# EAGLE board MODULO2_def (EAGLE 7.1.0)
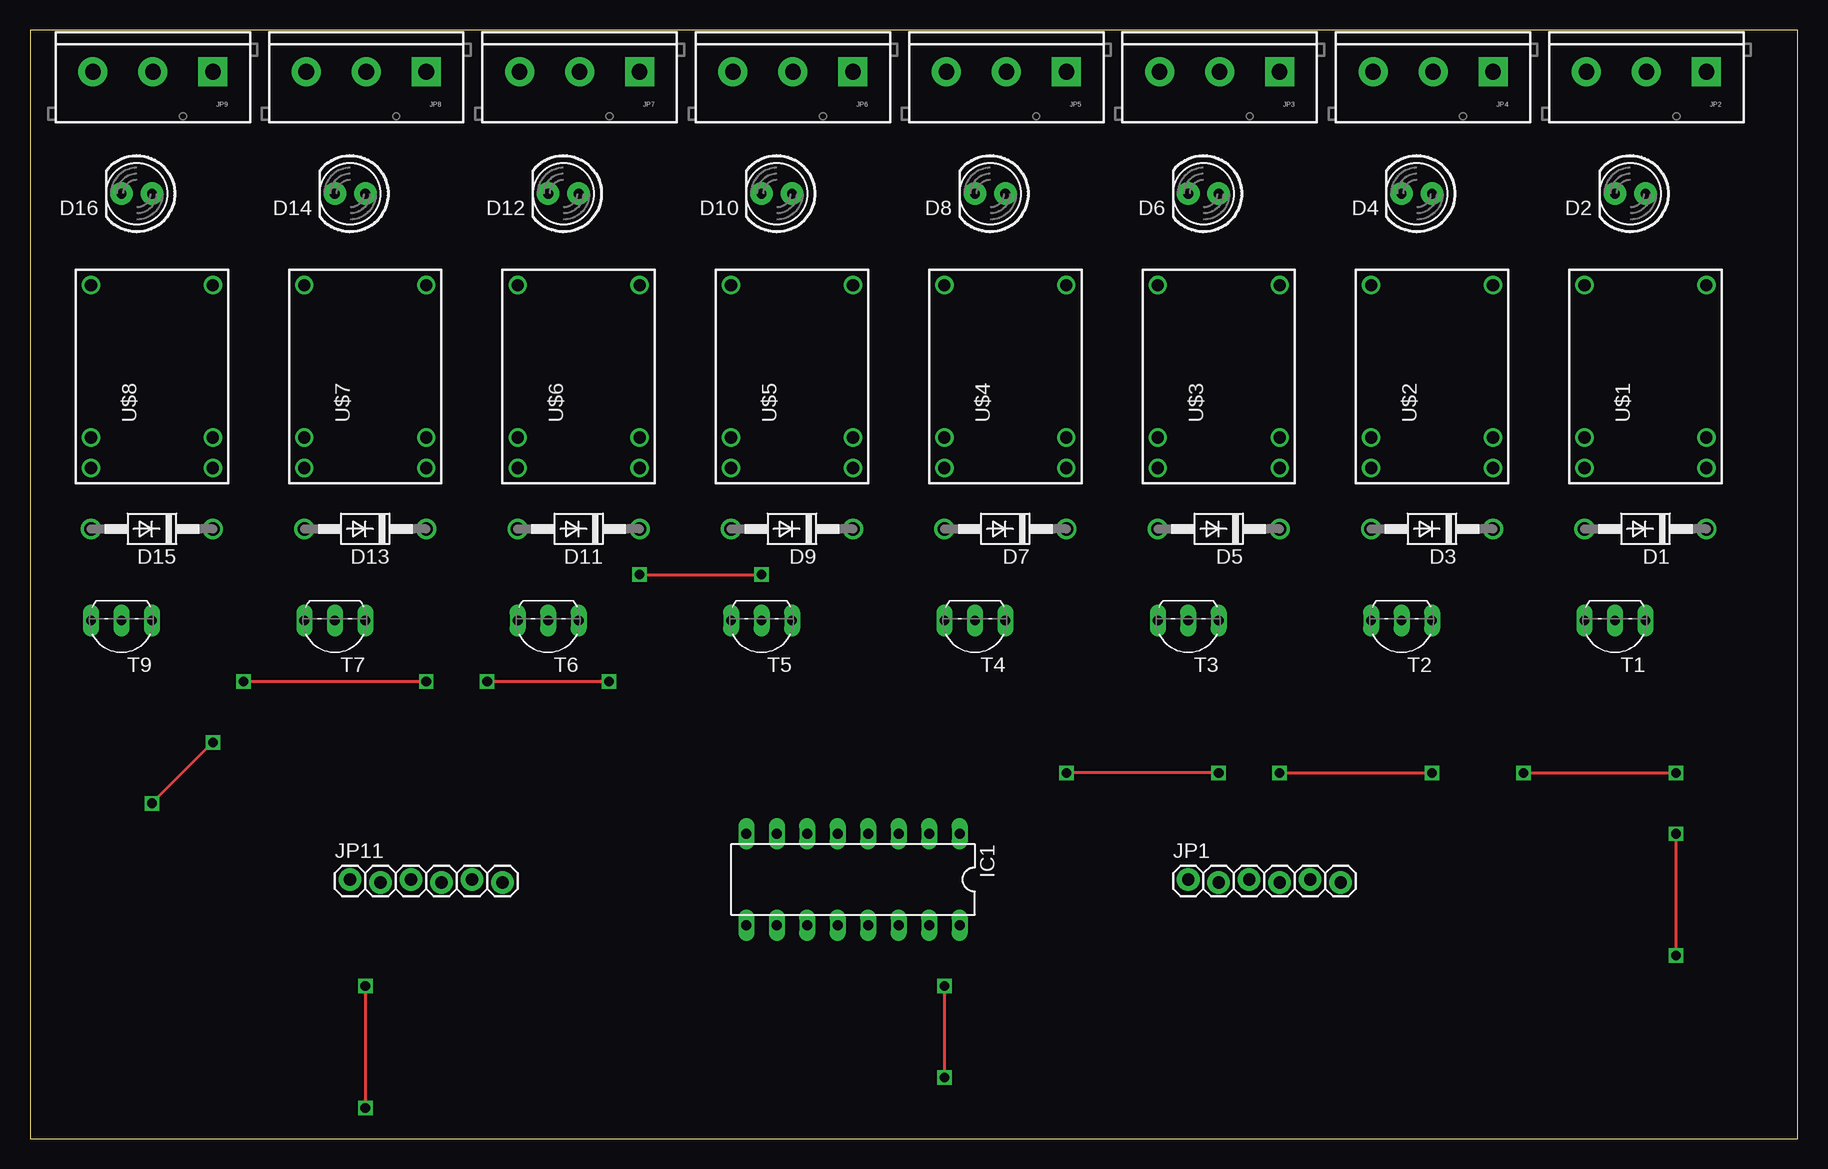
[diagram p0: board, top side]
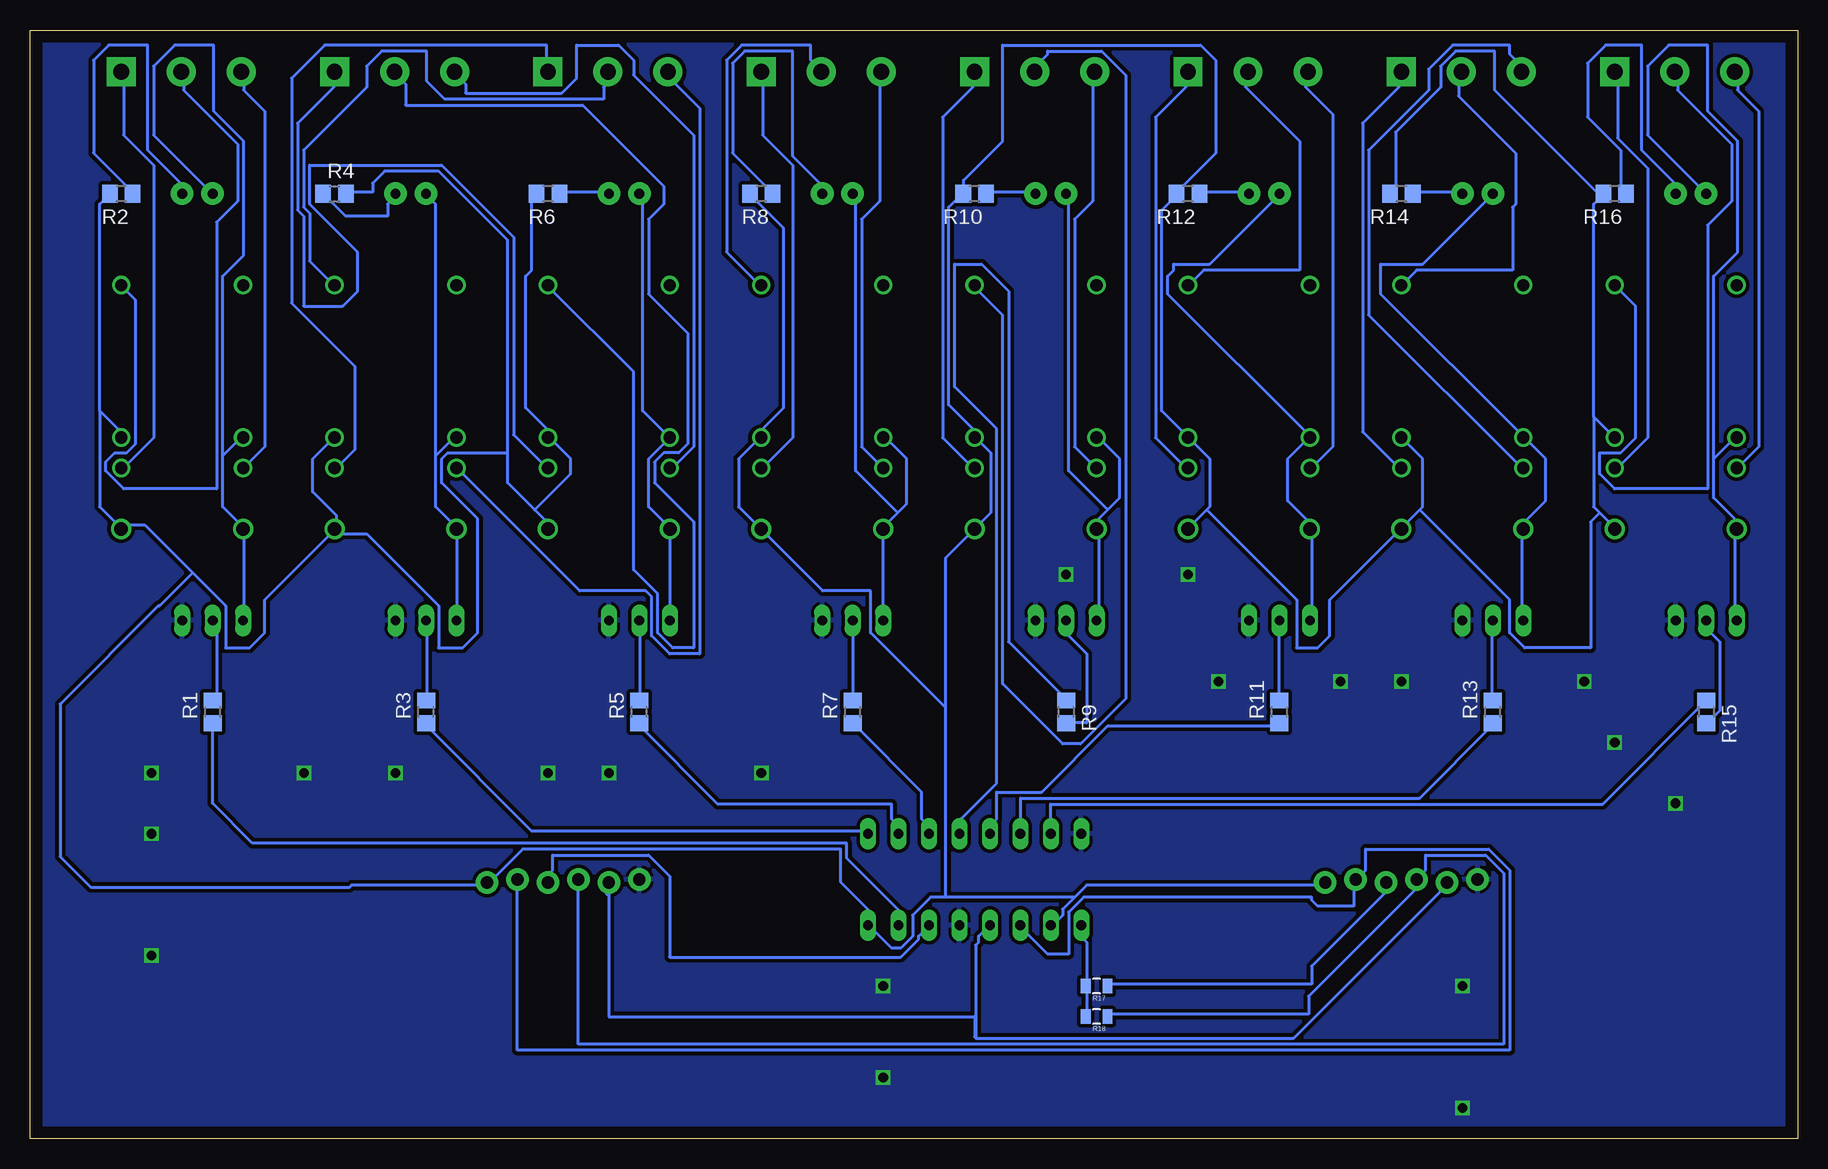
[diagram p1: board, bottom side, seen from below]

Size 147.3 x 92.38 mm. Coordinates in mm from the lower left corner, seen from the top.
Outline: 0,0 147.3,0 147.3,92.38 0,92.38 0,0
Copper layers (1*16): Top 0.035mm / dielectric 1.5mm / Bottom 0.035mm
Design rules "default": minimum track width 10mil, minimum drill 24mil, track to track 8mil, track to pad 8mil, pad to pad 8mil, via to via 8mil, smd to smd 8mil, copper to edge 40mil, drill to drill 8mil, minimum pad ring 10mil, minimum via ring 8mil, stop-mask expansion 4mil, vias tented up to drill 0mil, thermal gap 10mil

## Footprints (pad centres in the part's own frame; a part is rotated, then mirrored left to right if it is on the bottom)
DO41-10 = drill 1.118: A 5.08,0; C -5.08,0
LED5MM = drill 0.813 pad 1.88: A -1.27,0; K 1.27,0
DIL16 = drill 0.813 long: 1 -8.89,-3.81; 2 -6.35,-3.81; 3 -3.81,-3.81; 4 -1.27,-3.81; 5 1.27,-3.81; 6 3.81,-3.81; 7 6.35,-3.81; 8 8.89,-3.81; 9 8.89,3.81; 10 6.35,3.81; 11 3.81,3.81; 12 1.27,3.81; 13 -1.27,3.81; 14 -3.81,3.81; 15 -6.35,3.81; 16 -8.89,3.81
1X06_LOCK = drill 1.016 pad 1.88: 1 0,0; 2 2.54,-0.254; 3 5.08,0; 4 7.62,-0.254; 5 10.16,0; 6 12.7,-0.254
SCREWTERMINAL-5MM-3 = drill 1.3 pad 2.413 square: 1 0,0 | drill 1.3 pad 2.413: 2 5,0; 3 10,0
R0805 = smd 1.3 x 1.5: 1 -0.95,0; 2 0.95,0
0805 = smd 0.8 x 1.2: 1 -0.9,0; 2 0.9,0
TO92-EBC = drill 0.813 long: B 0,-1.27; C 2.54,-1.27; E -2.54,-1.27
HK4100 = drill 1.016: 1 7.62,5.08; 6 -5.08,5.08; 7 -7.62,5.08; 8 -7.62,-5.08; 9 -5.08,-5.08; 14 7.62,-5.08

## Placement (x,y rotation side)
D1  1N4933  [DO41-10]  134.62,50.8 180 top
D2  [LED5MM]  133.35,78.74 180 top
D3  1N4933  [DO41-10]  116.84,50.8 180 top
D4  [LED5MM]  115.57,78.74 180 top
D5  1N4933  [DO41-10]  99.06,50.8 180 top
D6  [LED5MM]  97.79,78.74 180 top
D7  1N4933  [DO41-10]  81.28,50.8 180 top
D8  [LED5MM]  80.01,78.74 180 top
D9  1N4933  [DO41-10]  63.5,50.8 180 top
D10  [LED5MM]  62.23,78.74 180 top
D11  1N4933  [DO41-10]  45.72,50.8 180 top
D12  [LED5MM]  44.45,78.74 180 top
D13  1N4933  [DO41-10]  27.94,50.8 180 top
D14  [LED5MM]  26.67,78.74 180 top
D15  1N4933  [DO41-10]  10.16,50.8 180 top
D16  [LED5MM]  8.89,78.74 180 top
IC1  74HC595N  [DIL16]  68.58,21.59 180 top
JP1  [1X06_LOCK]  96.52,21.59 0 top
JP2  [SCREWTERMINAL-5MM-3]  139.7,88.9 180 top
JP3  [SCREWTERMINAL-5MM-3]  104.14,88.9 180 top
JP4  [SCREWTERMINAL-5MM-3]  121.92,88.9 180 top
JP5  [SCREWTERMINAL-5MM-3]  86.36,88.9 180 top
JP6  [SCREWTERMINAL-5MM-3]  68.58,88.9 180 top
JP7  [SCREWTERMINAL-5MM-3]  50.8,88.9 180 top
JP8  [SCREWTERMINAL-5MM-3]  33.02,88.9 180 top
JP9  [SCREWTERMINAL-5MM-3]  15.24,88.9 180 top
JP11  [1X06_LOCK]  26.67,21.59 0 top
R1  [R0805]  132.08,35.56 90 bottom
R2  [R0805]  139.7,78.74 180 bottom
R3  [R0805]  114.3,35.56 90 bottom
R4  [R0805]  121.92,78.74 0 bottom
R5  [R0805]  96.52,35.56 90 bottom
R6  [R0805]  104.14,78.74 180 bottom
R7  [R0805]  78.74,35.56 90 bottom
R8  [R0805]  86.36,78.74 180 bottom
R9  [R0805]  60.96,35.56 270 bottom
R10  [R0805]  68.58,78.74 180 bottom
R11  [R0805]  43.18,35.56 90 bottom
R12  [R0805]  50.8,78.74 180 bottom
R13  [R0805]  25.4,35.56 90 bottom
R14  [R0805]  33.02,78.74 180 bottom
R15  [R0805]  7.62,35.56 270 bottom
R16  [R0805]  15.24,78.74 180 bottom
R17  [0805]  58.42,12.7 180 bottom
R18  [0805]  58.42,10.16 180 bottom
T1  [TO92-EBC]  132.08,41.91 180 top
T2  [TO92-EBC]  114.3,41.91 180 top
T3  [TO92-EBC]  96.52,41.91 180 top
T4  [TO92-EBC]  78.74,41.91 180 top
T5  [TO92-EBC]  60.96,41.91 180 top
T6  [TO92-EBC]  43.18,41.91 180 top
T7  [TO92-EBC]  25.4,41.91 180 top
T9  [TO92-EBC]  7.62,41.91 180 top
U$1  HK4100_DC5V_SHGHK  [HK4100]  134.62,63.5 90 top
U$2  HK4100_DC5V_SHGHK  [HK4100]  116.84,63.5 90 top
U$3  HK4100_DC5V_SHGHK  [HK4100]  99.06,63.5 90 top
U$4  HK4100_DC5V_SHGHK  [HK4100]  81.28,63.5 90 top
U$5  HK4100_DC5V_SHGHK  [HK4100]  63.5,63.5 90 top
U$6  HK4100_DC5V_SHGHK  [HK4100]  45.72,63.5 90 top
U$7  HK4100_DC5V_SHGHK  [HK4100]  27.94,63.5 90 top
U$8  HK4100_DC5V_SHGHK  [HK4100]  10.16,63.5 90 top

## Library data of the parts
D1 D3 D5 D7 D9 D11 D13 D15 = diode
D2 D4 D6 D8 D10 D12 D14 D16 = SparkFun-LED
IC1 = 74xx-eu
JP1 JP11 = SparkFun-Connectors
JP2-JP9 = SparkFun-Connectors; STOREFRONT_ID: PRT-08433
R1-R16 = resistor
R17 R18 = SparkFun-Resistors
T1-T7 T9 = transistor
U$1-U$8 = SparkFun-Electromechanical

## Nets
CS: IC1.12 JP1.2 JP11.2
GND: IC1.8 IC1.13 JP1.1 JP11.1 T1.E T2.E T3.E T4.E T5.E T6.E T7.E T9.E
N$1: IC1.15 R1.1
N$2: IC1.1 R3.1
N$3: D1.A D2.K T1.C U$1.6
N$4: D2.A R2.1
N$5: R1.2 T1.B
N$6: D3.A D4.K T2.C U$2.6
N$7: D5.A D6.K T3.C U$3.6
N$8: D6.A R6.1
N$9: R5.2 T3.B
N$10: D7.A D8.K T4.C U$4.6
N$11: D8.A R8.1
N$12: R7.2 T4.B
N$13: IC1.3 R7.1
N$14: D4.A R4.1
N$15: R3.2 T2.B
N$16: IC1.2 R5.1
N$17: D9.A D10.K T5.C U$5.6
N$18: D10.A R10.1
N$19: R9.2 T5.B
N$20: D11.A D12.K T6.C U$6.6
N$21: D12.A R12.1
N$22: R11.2 T6.B
N$23: D13.A D14.K T7.C U$7.6
N$24: D14.A R14.1
N$25: R13.2 T7.B
N$26: D15.A D16.K T9.C U$8.6
N$27: D16.A R16.1
N$28: R15.2 T9.B
N$29: IC1.5 R11.1
N$30: IC1.4 R9.1
N$31: IC1.6 R13.1
N$32: IC1.7 R15.1
N$33: JP2.1 U$1.8
N$34: JP2.2 U$1.14
N$35: JP2.3 U$1.7
N$36: JP3.1 U$2.8
N$37: JP3.2 U$2.14
N$38: JP3.3 U$2.7
N$39: JP4.1 U$3.8
N$40: JP4.2 U$3.14
N$41: JP4.3 U$3.7
N$42: JP5.1 U$4.8
N$43: JP5.2 U$4.14
N$44: JP5.3 U$4.7
N$45: JP6.1 U$5.8
N$46: JP6.2 U$5.14
N$47: JP6.3 U$5.7
N$48: JP7.1 U$6.8
N$49: JP7.2 U$6.14
N$50: JP7.3 U$6.7
N$51: JP8.1 U$7.8
N$52: JP8.2 U$7.14
N$53: JP8.3 U$7.7
N$54: JP9.1 U$8.8
N$55: JP9.2 U$8.14
N$56: JP9.3 U$8.7
OUTPUT: JP11.4 R17.1
QH: IC1.9 R17.2 R18.2
SCLK: IC1.11 JP1.5 JP11.5
SDI: JP1.3 JP11.3 R18.1
SDO: IC1.14 JP1.4
VCC: D1.C D3.C D5.C D7.C D9.C D11.C D13.C D15.C IC1.10 IC1.16 JP1.6 JP11.6 R2.2 R4.2 R6.2 R8.2 R10.2 R12.2 R14.2 R16.2 U$1.9 U$2.9 U$3.9 U$4.9 U$5.9 U$6.9 U$7.9 U$8.9

## Tracks (layer width: path | path; a pad name or v marks a point on that pad's centre or on a via)
CS
  Bottom 0.254: IC1.12 67.5,17.63 68.25,16.88 68.25,16.38 68.5,16.13 68.5,8.38 | JP1.2 99.25,21.13 99.25,20.38 99.06,20.38 99.06,10.16 68.58,10.16 68.58,8.46 68.5,8.38 | 68.5,8.38 42,8.38 29.25,21.13 JP11.2
GND  (via drill 0.8)
  Top 0.254: v17.78,38.1 v33.02,38.1 | v38.1,38.1 v48.26,38.1 | v15.24,33.02 v10.16,27.94 | v76.2,12.7 v76.2,5.08 | v27.94,12.7 v27.94,2.54 | v50.8,46.99 v60.96,46.99 | v99.06,30.48 v86.36,30.48 | v104.14,30.48 v116.84,30.48 | v124.46,30.48 v137.16,30.48 | v137.16,25.4 v137.16,15.24
  pour Bottom (isolate 0.305): 0,0 0,92.08 147.32,92.08 147.32,0
N$1
  Bottom 0.254: 132,34.38 R1.1 132.08,27.94 128.77,24.63 79.25,24.63 79.25,23.38 74.75,18.88 74.75,17.88 IC1.15
N$2
  Bottom 0.254: R3.1 114.25,34.38 105.5,25.63 77.5,25.63 IC1.1
N$3
  Bottom 0.254: T1.C 129.5,43.38 129.5,50.63 D1.A 129.75,50.88 129.75,51.13 131.25,52.63 131.25,56.88 | 131.25,56.88 129.75,58.38 U$1.6 | 131.25,56.88 131.25,71.88 129.5,73.63 129.5,83.13 132,85.63 132,91.13 135.25,91.13 137,89.38 137,83.63 132.25,78.88 D2.K
N$4
  Bottom 0.254: R2.1 138.75,78.88 142,82.13 142,89.88 140.75,91.13 137.5,91.13 137.5,82.38 134.75,79.63 134.75,78.88 D2.A
N$5
  Bottom 0.254: R1.2 132,36.63 131.75,36.88 131.75,42.88 132,43.13 T1.B
N$6
  Bottom 0.254: T2.C 111.75,43.38 111.75,50.63 D3.A 112,50.88 112,51.13 113.5,52.63 113.5,56.88 | 113.5,56.88 112,58.38 U$2.6 | 113.5,56.88 113.5,77.88 114.25,78.63 D4.K
N$7
  Bottom 0.254: T3.C 94,43.38 94,50.63 D5.A 94,50.88 95.75,52.63 95.75,56.63 94,58.38 | 94,58.38 96.25,60.63 96.25,78.38 96.5,78.63 D6.K | 94,58.38 U$3.6
N$8
  Bottom 0.254: R6.1 103,78.88 99.25,78.88 D6.A
N$9
  Bottom 0.254: R5.2 96.5,36.63 96.5,43.13 T3.B
N$10
  Bottom 0.254: T4.C 76.25,43.38 76.25,50.63 D7.A 76,50.88 76,51.13 75,52.13 | 75,52.13 74.25,52.88 74.25,56.63 76,58.38 U$4.6 | 75,52.13 78.5,55.63 78.5,78.63 D8.K
N$11
  Bottom 0.254: R8.1 85.5,78.88 88.75,82.13 88.75,89.63 87.75,90.63 83.75,90.63 83.75,81.88 81.5,79.63 81.5,78.88 D8.A
N$12
  Bottom 0.254: R7.2 78.75,36.63 78.75,43.13 T4.B
N$13
  Bottom 0.254: R7.1 78.5,34.38 73,28.88 73,26.63 72.5,26.13 72.5,25.63 IC1.3
N$14
  Bottom 0.254: R4.1 122.75,78.63 121,76.88 117.5,76.88 117.5,77.88 117,78.38 117,78.63 D4.A
N$15
  Bottom 0.254: R3.2 114.25,36.63 114.25,43.13 T2.B
N$16
  Bottom 0.254: R5.1 96.5,34.38 90,27.88 75.5,27.88 75.5,26.63 75,26.13 75,25.63 IC1.2
N$17
  Bottom 0.254: T5.C 58.25,43.38 58.25,50.63 D9.A 58.25,50.88 58.25,51.63 57.5,52.38 | 57.5,52.38 56.5,53.38 56.5,56.63 58.25,58.38 U$5.6 | 57.5,52.38 60.75,55.63 60.75,78.63 D10.K
N$18
  Bottom 0.254: R10.1 67.5,78.88 63.5,78.88 D10.A
N$19
  Bottom 0.254: R9.2 60.75,34.63 59.25,34.63 59.25,40.38 60.75,41.88 60.75,43.13 T5.B
N$20
  Bottom 0.254: T6.C 40.5,43.38 40.5,50.63 D11.A 40.75,50.88 40.75,51.38 42.5,53.13 42.5,56.63 40.75,58.38 U$6.6 40.75,58.63 52.5,70.38 52.5,71.88 52,72.38 52,72.88 49,72.88 43.25,78.63 D12.K
N$21
  Bottom 0.254: R12.1 49.75,78.88 45.75,78.88 D12.A
N$22
  Bottom 0.254: R11.2 43.25,36.63 43.25,43.13 T6.B
N$23
  Bottom 0.254: T7.C 23,43.38 23,50.63 D13.A 22.75,50.88 22.75,51.38 21,53.13 21,56.63 22.75,58.38 U$7.6 23,58.63 34.75,70.38 34.75,72.88 31.25,72.88 25.5,78.63 D14.K
N$24
  Bottom 0.254: R14.1 32,78.88 28,78.88 D14.A
N$25
  Bottom 0.254: R13.2 25.5,36.63 25.5,43.13 T7.B
N$26
  Bottom 0.254: T9.C 5.25,43.38 5.25,50.63 D15.A 5.25,50.88 5.25,51.63 7,53.38 7,56.63 | 7,56.63 5.25,58.38 U$8.6 | 7,56.63 7,71.88 5,73.88 5,83.13 7.5,85.63 7.5,91.13 10.75,91.13 12.5,89.38 12.5,83.63 7.75,78.88 D16.K
N$27
  Bottom 0.254: R16.1 14.5,78.88 14.75,79.13 14.75,82.38 17.5,85.13 17.5,89.63 16,91.13 13,91.13 13,82.38 10.25,79.63 10.25,78.88 D16.A
N$28
  Bottom 0.254: R15.2 7.5,34.63 6.5,35.63 6.5,41.38 7.5,42.38 7.5,43.13 T9.B
N$29
  Bottom 0.254: R11.1 43.25,34.38 57.5,34.38 63,28.88 66.75,28.88 66.75,26.63 67.25,26.13 67.25,25.63 IC1.5
N$30
  Bottom 0.254: R9.1 61,36.63 65.75,41.38 65.75,70.63 68,72.88 70.25,72.88 70.25,62.63 66.75,59.13 66.75,29.63 69.75,26.63 69.75,25.63 IC1.4
N$31
  Bottom 0.254: R13.1 25.5,34.38 31.5,28.38 64.75,28.38 64.75,25.63 IC1.6
N$32
  Bottom 0.254: R15.1 16.25,27.88 62.25,27.88 62.25,25.63 IC1.7
N$33
  Bottom 0.254: U$1.8 139.5,55.88 137,58.38 137,81.13 139.5,83.63 139.5,88.88 JP2.1
N$34
  Bottom 0.254: U$1.14 139.5,70.88 138.5,69.88 138.5,57.88 139.25,57.13 140.25,57.13 141,56.38 141,55.63 139.5,54.13 131.75,54.13 131.75,76.38 130,78.13 130,82.88 134.5,87.38 134.5,88.88 JP2.2
N$35
  Bottom 0.254: U$1.7 129.5,55.88 127.75,57.63 127.75,85.63 129.5,87.38 129.5,88.88 JP2.3
N$36
  Bottom 0.254: U$2.8 121.75,55.88 120.25,57.38 120.25,64.38 125.5,69.63 125.5,88.38 122.75,91.13 104.25,91.13 104.25,89.13 JP3.1
N$37
  Bottom 0.254: U$2.14 122,71.13 124,73.13 124,77.13 124.5,77.63 124.5,82.38 119.25,87.63 119.25,89.38 118,90.63 114.25,90.63 114.25,88.13 112.75,86.63 99.5,86.63 99.5,87.63 99.25,87.88 99.25,88.88 JP3.2
N$38
  Bottom 0.254: U$2.7 101.5,45.63 96,45.63 95.5,45.13 95.5,41.88 94,40.38 91.5,40.38 91.5,85.88 94,88.38 94,88.88 JP3.3
N$39
  Bottom 0.254: U$3.8 104.25,55.88 107,58.63 107,75.13 113,81.13 124,81.13 124,77.88 120,73.88 120,70.63 121.25,69.38 124.5,69.38 124.5,76.88 125,77.38 125,84.63 122,87.63 122,88.88 JP4.1
N$40
  Bottom 0.254: U$3.14 104,70.88 97,63.88 97,47.38 95,45.38 95,42.13 93.75,40.88 92,40.88 92,51.38 95.25,54.63 95.25,56.38 94.5,57.13 93.25,57.13 92.5,57.88 92.5,67.13 95.75,70.38 95.75,76.63 94.5,77.88 94.5,79.38 101.25,86.13 116,86.13 116,87.88 116.75,88.63 116.75,88.88 JP4.2
N$41
  Bottom 0.254: U$3.7 93.75,55.88 92,57.63 92,83.63 97,88.63 97,89.88 98.25,91.13 101.75,91.13 101.75,88.38 103,87.13 111,87.13 111,87.88 111.75,88.63 111.75,88.88 JP4.3
N$42
  Bottom 0.254: U$4.8 86.25,55.88 83.75,58.38 83.75,81.13 86.25,83.63 86.25,88.88 JP5.1
N$43
  Bottom 0.254: U$4.14 86.5,71.13 89.25,73.88 89.25,89.88 88,91.13 82.25,91.13 82.25,89.88 81.5,89.13 JP5.2
N$44
  Bottom 0.254: U$4.7 76.25,55.88 78,57.63 78,76.63 76.5,78.13 76.5,88.88 JP5.3
N$45
  Bottom 0.254: U$5.8 68.75,55.88 71.25,58.38 71.25,85.13 68.75,87.63 68.75,88.88 JP6.1
N$46
  Bottom 0.254: U$5.14 68.5,70.88 66.25,68.63 66.25,37.88 61.25,32.88 59.75,32.88 56,36.63 56,88.63 58,90.63 62.5,90.63 62.5,90.38 63.5,89.38 63.5,89.13 JP6.2
N$47
  Bottom 0.254: U$5.7 58.5,55.88 60.25,57.63 60.25,76.63 58.75,78.13 58.75,88.88 JP6.3
N$48
  Bottom 0.254: U$6.8 51,55.88 53.5,58.38 53.5,85.13 51,87.63 51,88.88 JP7.1
N$49
  Bottom 0.254: U$6.14 50.75,71.13 49.5,72.38 41.5,72.38 41.5,83.13 46,87.63 46,88.88 JP7.2
N$50
  Bottom 0.254: U$6.7 40.5,55.88 38.75,57.63 38.75,85.38 41,87.63 41,88.88 JP7.3
N$51
  Bottom 0.254: U$7.8 33.25,55.88 36.25,58.88 36.25,84.63 33.25,87.63 33.25,88.88 JP8.1
N$52
  Bottom 0.254: U$7.14 33,71.13 31.75,72.38 23.75,72.38 23.75,77.63 23.5,77.88 23.5,82.13 28.25,86.88 28.25,88.88 JP8.2
N$53
  Bottom 0.254: U$7.7 23,55.88 35.75,68.63 35.75,82.38 30.75,87.38 30.75,89.13 28.75,91.13 24,91.13 24,90.38 23.25,89.63 23.25,89.13 JP8.3
N$54
  Bottom 0.254: U$8.8 15,55.88 12.5,58.38 12.5,80.88 15,83.38 15,88.88 JP9.1
N$55
  Bottom 0.254: U$8.14 13.5,69.38 13.5,58.38 14.75,57.13 16.5,57.13 16.5,55.38 15.25,54.13 7.5,54.13 7.5,76.13 5.5,78.13 5.5,82.88 10,87.38 10,88.88 JP9.2
N$56
  Bottom 0.254: U$8.7 5,55.88 3.25,57.63 3.25,85.63 5,87.38 5,88.88 JP9.3
OUTPUT
  Bottom 0.254: R17.1 57.5,12.88 40.5,12.88 40.5,14.38 34.5,20.38 34.5,21.13 JP11.4
QH
  Bottom 0.254: R18.2 59.25,10.38 59.25,12.63 R17.2 59.25,12.88 59.25,16.38 59.5,16.63 59.5,17.63 IC1.9
SCLK
  Bottom 0.254: IC1.11 64.75,17.63 62.5,15.38 60.75,15.38 60.75,18.88 59.5,20.13 40.5,20.13 40.5,19.88 40,19.38 37,19.38 37,21.38 JP11.5 36.75,21.63 36,22.38 36,24.13 25.75,24.13 24,22.38 24,7.38 106.68,7.38 JP1.5 106.5,21.38
SDI
  Bottom 0.254: R18.1 57.5,10.38 40.75,10.38 40.75,11.88 31.75,20.88 JP11.3 31.75,21.63 31,22.38 31,23.63 26,23.63 24.5,22.13 24.5,7.88 101.6,7.88 JP1.3 101.5,21.38
SDO
  Bottom 0.254: IC1.14 72.5,17.63 73.25,16.88 73.25,16.63 74.75,15.13 94,15.13 94,21.88 95.75,23.63 103.75,23.63 103.75,22.38 104,22.13 104,21.38 JP1.4
VCC
  Bottom 0.254: 31.5,52.38 33,50.88 D13.C 33.25,50.63 39,44.88 39,41.88 40,40.88 41.75,40.88 41.75,44.88 49.25,52.38 | 31.5,52.38 31.25,52.63 31.25,56.63 33,58.38 U$7.9 | 49.25,52.38 49,52.63 49,56.63 50.75,58.38 U$6.9 51,58.63 53,60.63 53,77.38 51.75,78.63 R12.2 51.75,78.88 48.5,82.13 48.5,89.88 49.75,91.13 66.25,91.13 66.25,83.13 69.5,79.88 69.5,78.88 R10.2 69.75,78.63 70.75,77.63 70.75,61.13 68.75,59.13 68.75,58.63 U$5.9 68.5,58.38 67.25,57.13 67.25,52.13 D9.C 71,48.38 71,35.88 | 49.25,52.38 50.75,50.88 D11.C | 16.5,78.38 17,77.88 17,60.13 | 16.5,78.38 16.25,78.63 R16.2 16.5,78.38 | 17,60.13 15.25,58.38 U$8.9 | 16.5,78.38 16.5,78.63 25.25,87.38 25.25,90.63 28.5,90.63 29.75,89.38 29.75,87.63 33.5,83.88 33.5,79.13 33.75,78.88 R14.2 | 16.5,52.13 17,52.63 17,60.13 | 16.5,52.13 15.25,50.88 D15.C | 31.5,52.38 24,44.88 24,42.13 22.75,40.88 17.25,40.88 17.25,51.38 16.5,52.13 | R6.2 105.25,78.63 105.5,78.38 105.5,72.38 106,71.88 106,60.88 104.25,59.13 104.25,58.63 U$3.9 104,58.38 102.25,56.63 102.25,55.38 105.25,52.38 | 107.5,57.13 107.5,54.63 105.25,52.38 | 107.5,57.13 107.5,74.88 113.25,80.63 117.75,80.63 118.75,79.63 118.75,78.88 120.75,78.88 R4.2 | 105.25,52.38 104.25,51.38 104.25,50.88 D5.C | U$2.9 122,58.38 123.75,56.63 123.75,53.88 121.75,51.88 121.75,50.88 D3.C | 141.5,60.63 141.5,77.88 140.75,78.63 R2.2 | 141.5,60.63 139.75,58.88 139.75,58.63 U$1.9 | 141.5,60.63 141.5,52.63 139.75,50.88 D1.C 139.5,50.88 139.5,51.13 137.75,51.13 133.75,47.13 | 133.75,47.13 131,44.38 131,40.88 129,40.88 127.75,42.13 127.75,44.88 122,50.63 D3.C | 107.5,57.13 112.5,57.13 113,56.63 113,54.63 110,51.63 110,42.13 111.25,40.88 113.25,40.88 113.25,44.38 119.25,50.38 121.75,50.38 121.75,50.63 D3.C
  Bottom 0.254: R8.2 87.25,78.63 84.5,75.88 84.5,60.88 86.25,59.13 86.25,58.63 U$4.9 86.5,58.38 88.25,56.63 88.25,52.63 86.5,50.88 D7.C 86.25,50.63 81.25,45.63 77.25,45.63 77.25,42.13 71,35.88 | 60.25,20.13 59.25,21.13 39.5,21.13 JP11.6 | 60.25,20.13 61.25,19.13 61.25,18.63 62,17.88 IC1.10 | 60.25,20.13 71,20.13 | 71,20.13 72.25,20.13 73.75,18.63 73.75,16.88 74.75,15.88 75.5,15.88 77.25,17.63 IC1.16 77.25,17.88 77.25,18.88 79.75,21.38 79.75,24.13 106.25,24.13 109,21.38 JP1.6 109.25,21.13 120.5,21.13 120.67,20.95 142.24,20.95 144.78,23.5 144.78,36.2 136.59,44.38 136.5,44.38 133.75,47.13 | 71,20.13 71,35.88